# EAGLE board mi6k_portable_pcb (EAGLE 4.11)
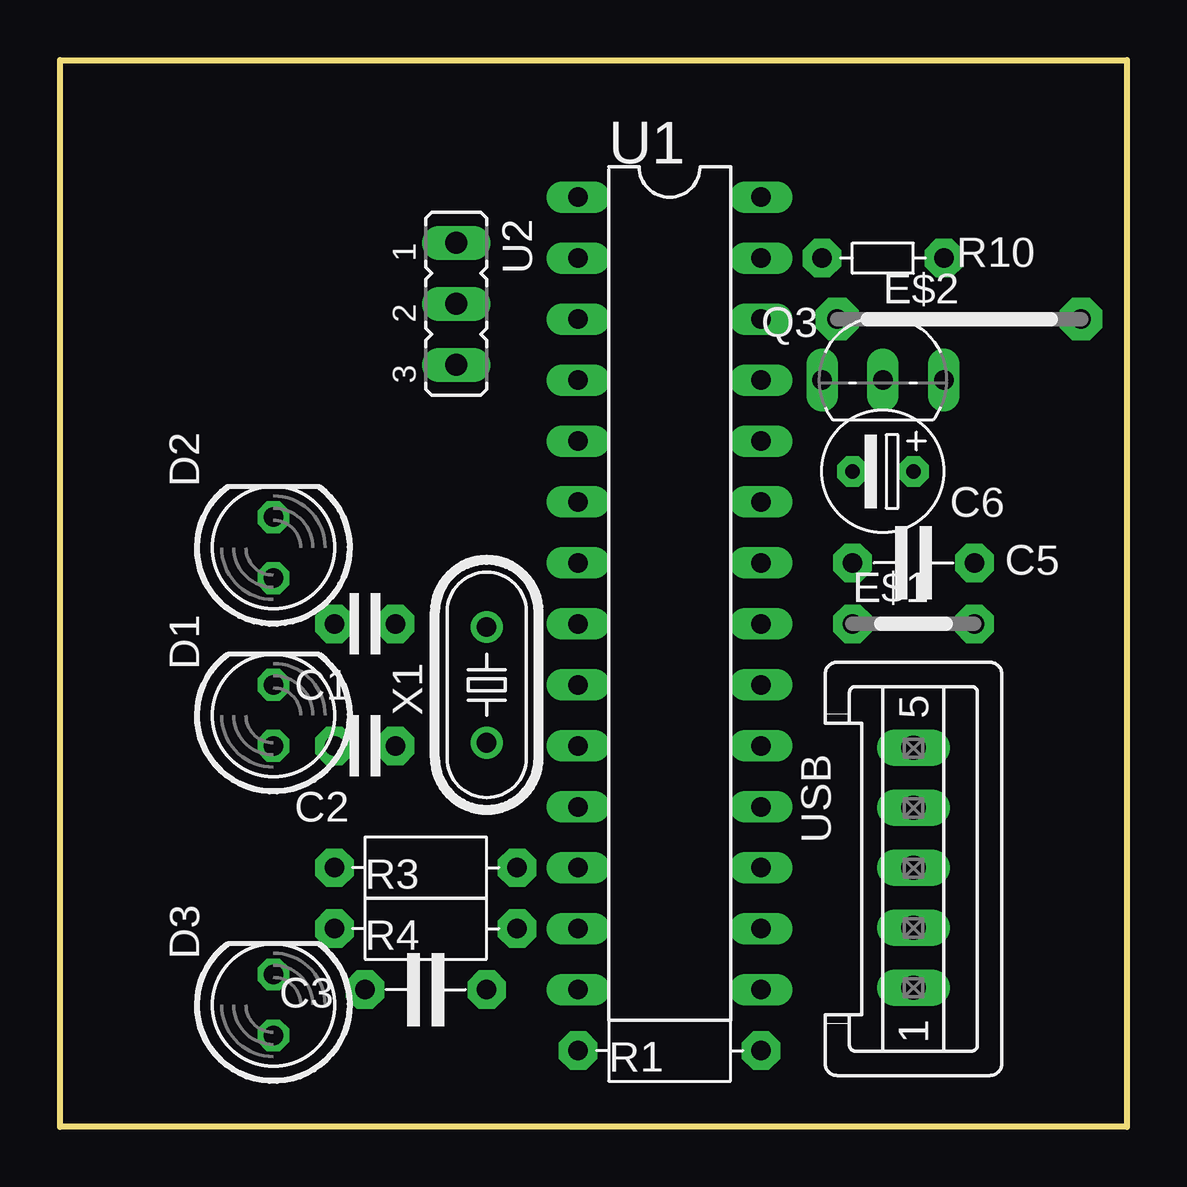
[diagram p0: board, top side]
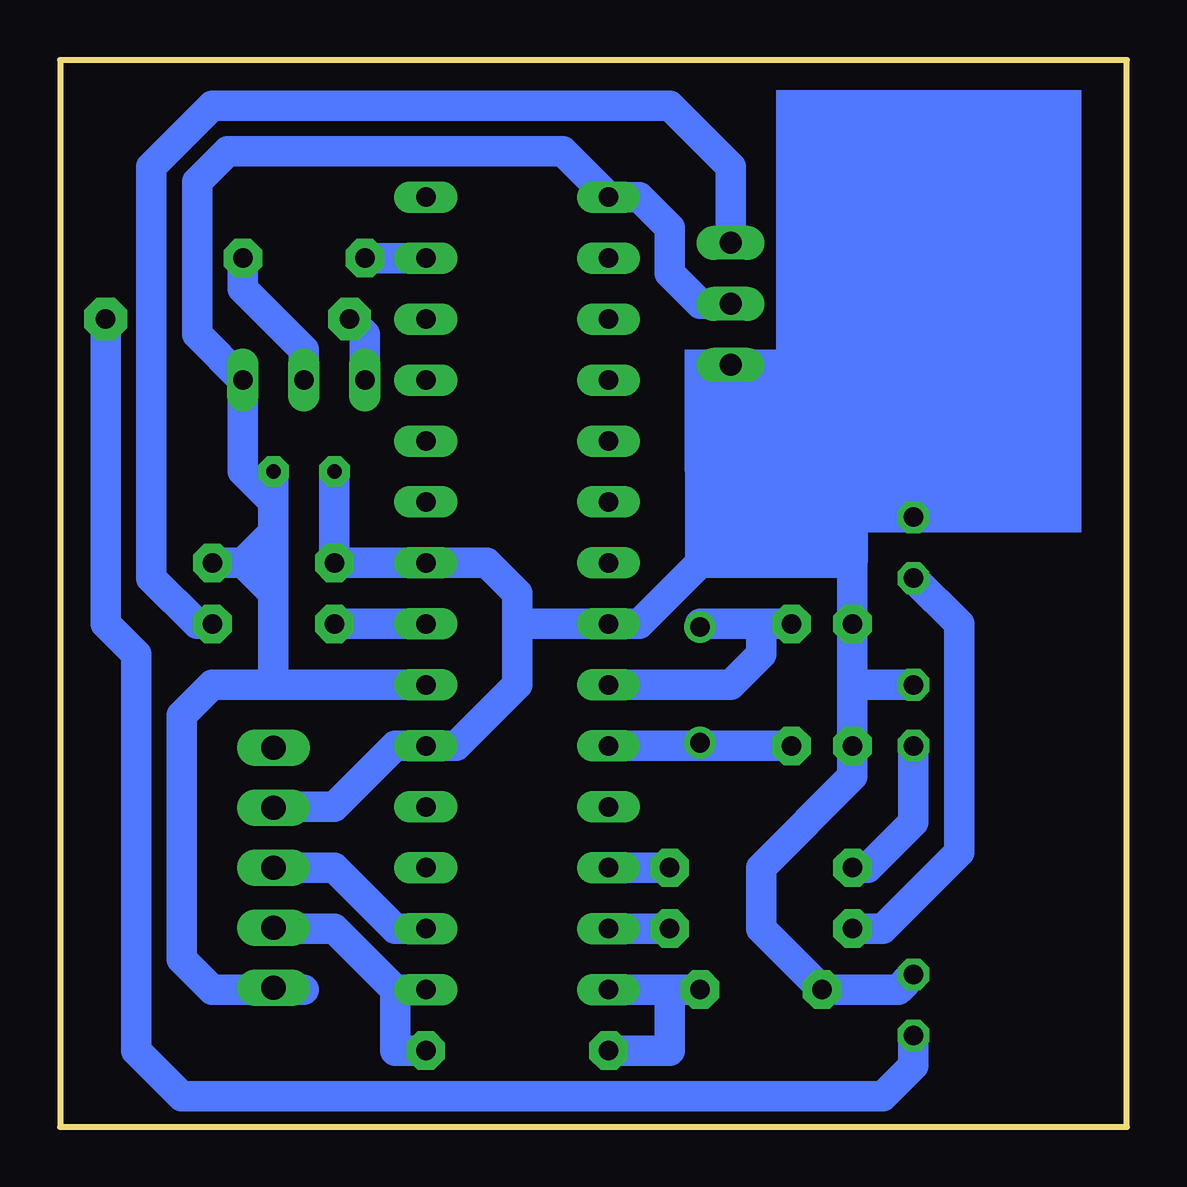
[diagram p1: board, bottom side, seen from below]

Size 44.45 x 44.45 mm. Coordinates in mm from the lower left corner, seen from the top.
Outline: 0,0 0,44.45 44.45,44.45 44.45,0 0,0
Copper layers (1*16): Top 0.035mm / dielectric 1.5mm / Bottom 0.035mm
Design rules "default": minimum track width 10mil, minimum drill 24mil, track to track 8mil, track to pad 8mil, pad to pad 8mil, via to via 8mil, smd to smd 8mil, copper to edge 40mil, drill to drill 8mil, minimum pad ring 10mil, minimum via ring 8mil, stop-mask expansion 4mil, vias tented up to drill 0mil, thermal gap 10mil

## Footprints (pad centres in the part's own frame; a part is rotated, then mirrored left to right if it is on the bottom)
C-2,5 = drill 0.813 pad 1.6 octagon: 1 -1.27,0; 2 1.27,0
C-5 = drill 0.813 pad 1.6 octagon: 1 -2.54,0; 2 2.54,0
ES-2,5L = drill 0.61 pad 1.27 octagon: 1 0,0; 2 2.54,0
LED5MM = drill 0.813 octagon: A -1.27,0; K 1.27,0
05 = drill 0.813 pad 1.6 octagon: 1 -2.54,0; 2 2.54,0
10E = drill 0.813 pad 1.778 octagon: 1 -5.08,0; 2 5.08,0
TO92-EBC = drill 0.813 long: B 0,-1.27; C -2.54,-1.27; E 2.54,-1.27
R-7,5 = drill 0.813 pad 1.6 octagon: 1 -3.81,0; 2 3.81,0
R-5 = drill 0.813 pad 1.6 octagon: 1 -2.54,0; 2 2.54,0
DIL28-3 = drill 0.813 long: 1 -16.51,-3.81; 2 -13.97,-3.81; 3 -11.43,-3.81; 4 -8.89,-3.81; 5 -6.35,-3.81; 6 -3.81,-3.81; 7 -1.27,-3.81; 8 1.27,-3.81; 9 3.81,-3.81; 10 6.35,-3.81; 11 8.89,-3.81; 12 11.43,-3.81; 13 13.97,-3.81; 14 16.51,-3.81; 15 16.51,3.81; 16 13.97,3.81; 17 11.43,3.81; 18 8.89,3.81; 19 6.35,3.81; 20 3.81,3.81; 21 1.27,3.81; 22 -1.27,3.81; 23 -3.81,3.81; 24 -6.35,3.81; 25 -8.89,3.81; 26 -11.43,3.81; 27 -13.97,3.81; 28 -16.51,3.81
JP2Y = drill 0.914 long: 1 -2.54,0; 2 0,0; 3 2.54,0
S05P = drill 1.016 long: 1 5,0; 2 2.5,0; 3 0,0; 4 -2.5,0; 5 -5,0
HC49/S = drill 0.813 round: 1 -2.413,0; 2 2.413,0

## Placement (x,y rotation side)
C1  [C-2,5]  12.7,20.95 180 top
C2  [C-2,5]  12.7,15.88 180 top
C3  [C-5]  15.24,5.71 180 top
C5  [C-5]  35.56,23.5 0 top
C6  [ES-2,5L]  35.56,27.3 180 top
D1  [LED5MM]  8.89,17.14 90 top
D2  [LED5MM]  8.89,24.13 90 top
D3  [LED5MM]  8.89,5.08 90 top
E$1  [05]  35.56,20.95 0 top
E$2  [10E]  37.47,33.66 0 top
Q3  [TO92-EBC]  34.29,32.38 0 top
R1  [R-7,5]  25.4,3.17 0 top
R3  [R-7,5]  15.24,10.79 0 top
R4  [R-7,5]  15.24,8.26 0 top
R10  [R-5]  34.29,36.2 180 top
U1  [DIL28-3]  25.4,22.23 270 top
U2  [JP2Y]  16.51,34.29 270 top
USB  [S05P]  35.56,10.79 270 top
X1  [HC49/S]  17.78,18.41 90 top

## Library data of the parts
C1-C3 C5 C6 R1 R3 R4 R10 = discrete
D1-D3 = led
E$1 E$2 U2 = jumper
Q3 = transistor
U1 = microchip
USB = con-amp-mt
X1 = crystal

## Nets
S$1: D1.A R3.1
S$2: C2.1 U1.10
S$3: E$1.1 U1.21
S$4: U1.16 USB.3
S$5: R10.2 U1.27
S$7: C1.1 U1.9
S$8: C3.1 R1.1 U1.14
S$9: E$1.2 U2.1
S$10: Q3.B R10.1
S$11: R3.2 U1.12
S$12: R4.2 U1.13
S$13: D3.K
S$14: R1.2 U1.15
S$15: C5.2 C6.1 Q3.E U1.1 U1.20
S$16: D3.A
S$17: D2.A R4.1
S$18: C1.2 C2.2 C3.2 C5.1 C6.2 D1.K D2.K U1.8 U1.19 U1.22 U2.3
S$19: E$2.1 Q3.C

## Tracks (layer width: path | path; a pad name or v marks a point on that pad's centre or on a via)
S$1
  Bottom 1.27: D1.A 8.89,12.7 10.79,10.79 R3.1
S$2
  Bottom 1.27: C2.1 U1.10
S$3
  Bottom 1.27: U1.21 E$1.1
S$4
  Bottom 1.27: U1.16 30.48,8.26 33.02,10.79 USB.3
S$5
  Bottom 1.27: U1.27 R10.2
S$6
  Bottom 1.27: 20.95,38.73 20.32,38.73 19.05,37.47 19.05,35.56 17.78,34.29 15.88,34.29
S$7
  Bottom 1.27: U1.9 16.51,18.41 15.24,19.68 15.24,20.95 | 15.24,20.95 C1.1 | 15.24,20.95 17.78,20.95
S$8
  Bottom 1.27: R1.1 19.05,3.17 19.05,5.71 | C3.1 19.05,5.71 | 19.05,5.71 U1.14
S$9
  Bottom 1.27: U2.1 16.51,40.01 19.05,42.55 38.1,42.55 40.64,40.01 40.64,22.86 38.73,20.95 E$1.2
S$10
  Bottom 1.27: Q3.B 34.29,32.38 36.83,34.92 R10.1
S$11
  Bottom 1.27: R3.2 U1.12
S$12
  Bottom 1.27: R4.2 U1.13
S$13
  Bottom 1.27: 12.06,5.71 9.53,5.71 D3.K
S$14
  Bottom 1.27: R1.2 30.48,3.17 30.48,5.71 | 30.48,5.71 U1.15 | 30.48,5.71 33.02,8.26 35.56,8.26
S$15
  Bottom 1.27: 36.83,23.5 35.56,24.77 35.56,26.04 | 36.83,23.5 C5.2 | 36.83,23.5 35.56,23.5 35.56,22.23 | 35.56,26.04 36.83,27.3 Q3.E 38.73,33.02 38.73,39.37 37.47,40.64 23.5,40.64 U1.1 | 35.56,26.04 C6.1 35.56,18.41 | 35.56,22.23 36.83,23.5 | 35.56,18.41 U1.20 | 35.56,18.41 35.56,22.23 | 35.56,18.41 38.1,18.41 39.37,17.14 39.37,6.99 38.1,5.71 34.29,5.71
S$16
  Bottom 1.27: D3.A 8.89,2.54 10.16,1.27 39.37,1.27 41.27,3.17 41.27,19.68 42.55,20.95 42.55,33.66
S$17
  Bottom 1.27: R4.1 10.16,8.26 6.99,11.43 6.99,20.95 D2.A
S$18
  Bottom 1.27: D2.K 11.43,25.4 11.43,23.5 | U2.3 17.78,30.48 17.78,23.5 | 35.56,13.34 33.02,13.34 30.48,15.88 U1.19 27.94,15.88 25.4,18.41 25.4,20.95 | C6.2 C5.1 U1.22 26.67,23.5 25.4,22.23 25.4,20.95 | 25.4,20.95 U1.8 20.32,20.95 17.78,23.5 | 11.43,23.5 17.78,23.5 | 11.43,18.41 C2.2 11.43,14.61 15.24,10.79 15.24,8.26 C3.2 | 11.43,18.41 C1.2 11.43,23.5 | D1.K 11.43,18.41
S$19
  Bottom 1.27: E$2.1 31.75,33.02 Q3.C
(copper drawn outside any net)
  shapes: Bottom area x5